# Altium PCB FPGA_board.PcbDoc (part 3 of 7)
Units mm, origin at the board's own origin, x right, y up, seen from the top; angles counter-clockwise.
Board outline 120 x 95 mm, 2 copper layers (Top Layer, Bottom Layer); 242 components, 219 nets, 1224 pads, 430 vias.
Unrouted connection lines stored in the file: 9.
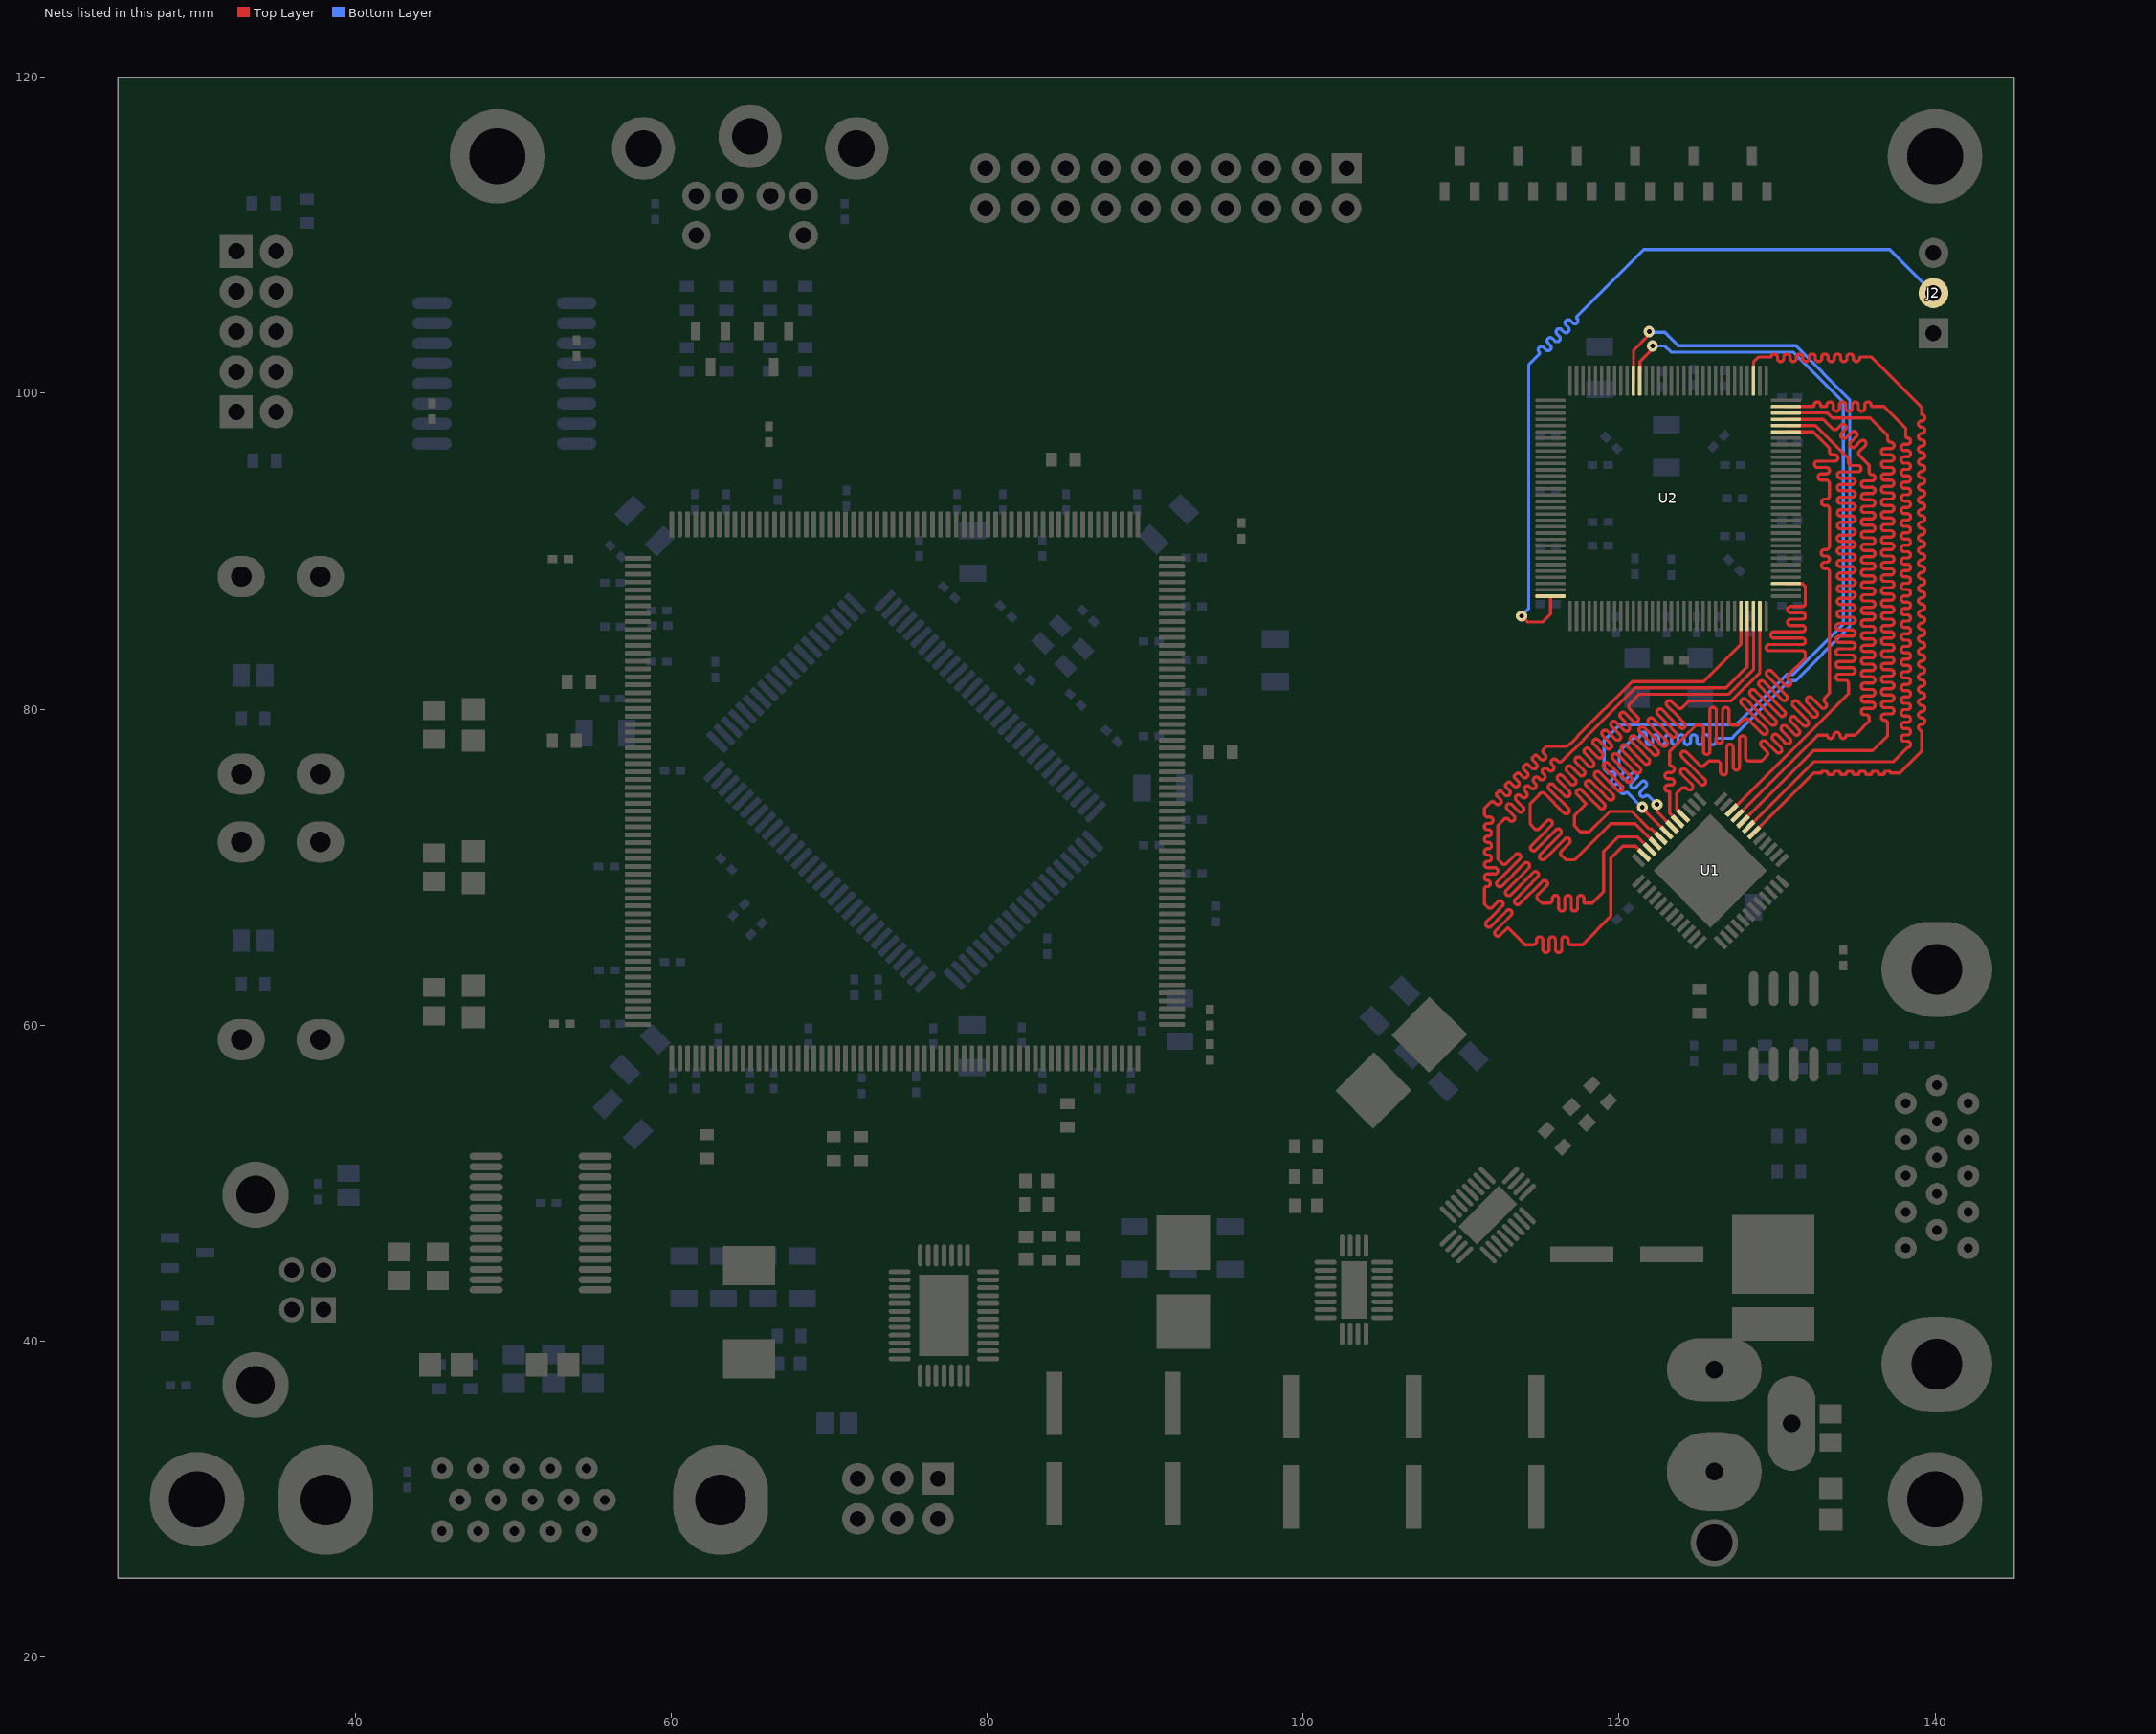
[diagram p3: the nets of this part, all layers, seen from the top]

## Via types
v1: diameter 0.71, hole 0.3, Top Layer to Bottom Layer, 393 vias
v2: diameter 1.4, hole 0.6, Top Layer to Bottom Layer, 32 vias
v3: diameter 2, hole 0.9, Top Layer to Bottom Layer, 4 vias
v4: diameter 1.2, hole 0.5, Top Layer to Bottom Layer, 1 vias

## Nets (pads, with @x,y where several pads share a name; then routed paths per layer and width w, separated by ;. In a path a pad name is that pad's centre, name@x,y a point inside that pad or via, vN(x,y) a via of type N, cw(c..) or ccw(c..) an arc to the next point about the centre after c; other vN are vias at no path point) (continued)
FB_D11: U1.6 U2.67 | length 64.8
  Top Layer w0.2: U2.67@128.51,100.803 128.51,101.973 128.837,102.3 129.225,102.3 129.625,102.3 cw(c129.8,102.3) 129.8,102.475 129.85,102.475 cw(c129.85,102.3) 130.025,102.3 130.025,102.2 ccw(c130.225,102.2) 130.225,102 ccw(c130.225,102.2) 130.425,102.2 130.425,102.3 cw(c130.6,102.3) 130.6,102.475 130.65,102.475 cw(c130.65,102.3) 130.825,102.3 130.825,102.2 ccw(c131.025,102.2) 131.025,102 ccw(c131.025,102.2) 131.225,102.2 131.225,102.3 cw(c131.4,102.3) 131.4,102.475 131.45,102.475 cw(c131.45,102.3) 131.625,102.3 131.625,102.2 ccw(c131.825,102.2) 131.825,102 ccw(c131.825,102.2) 132.025,102.2 132.025,102.3 cw(c132.2,102.3) 132.2,102.475 132.25,102.475 cw(c132.25,102.3) 132.425,102.3 132.425,102.2 ccw(c132.625,102.2) 132.625,102 ccw(c132.625,102.2) 132.825,102.2 132.825,102.3 cw(c133,102.3) 133,102.475 133.05,102.475 cw(c133.05,102.3) 133.225,102.3 133.225,102.2 ccw(c133.425,102.2) 133.425,102 ccw(c133.425,102.2) 133.625,102.2 133.625,102.3 cw(c133.8,102.3) 133.8,102.475 133.85,102.475 cw(c133.85,102.3) 134.025,102.3 134.025,102.2 ccw(c134.225,102.2) 134.225,102 ccw(c134.225,102.2) 134.425,102.2 134.425,102.3 cw(c134.6,102.3) 134.6,102.475 134.65,102.475 cw(c134.65,102.3) 134.825,102.3 134.825,102.2 ccw(c135.025,102.2) 135.025,102 ccw(c135.025,102.2) 135.225,102.2 cw(c135.325,102.2) 135.325,102.3 135.425,102.3 135.95,102.3 139.15,99.1 139.15,98.65 cw(c139.15,98.45) 139.15,98.25 ccw(c139.15,98.05) 139.15,97.85 cw(c139.15,97.65) 139.15,97.45 ccw(c139.15,97.25) 139.15,97.05 cw(c139.15,96.85) 139.15,96.65 ccw(c139.15,96.45) 139.15,96.25 cw(c139.15,96.05) 139.15,95.85 ccw(c139.15,95.65) 139.15,95.45 cw(c139.15,95.25) 139.15,95.05 ccw(c139.15,94.85) 139.15,94.65 cw(c139.15,94.45) 139.15,94.25 ccw(c139.15,94.05) 139.15,93.85 cw(c139.15,93.65) 139.15,93.45 ccw(c139.15,93.25) 139.15,93.05 cw(c139.15,92.85) 139.15,92.65 ccw(c139.15,92.45) 139.15,92.25 cw(c139.15,92.05) 139.15,91.85 ccw(c139.15,91.65) 139.15,91.45 cw(c139.15,91.25) 139.15,91.05 ccw(c139.15,90.85) 139.15,90.65 cw(c139.15,90.45) 139.15,90.25 ccw(c139.15,90.05) 139.15,89.85 cw(c139.15,89.65) 139.15,89.45 ccw(c139.15,89.25) 139.15,89.05 cw(c139.15,88.85) 139.15,88.65 ccw(c139.15,88.45) 139.15,88.25 cw(c139.15,88.05) 139.15,87.85 ccw(c139.15,87.65) 139.15,87.45 cw(c139.15,87.25) 139.15,87.05 ccw(c139.15,86.85) 139.15,86.65 cw(c139.15,86.45) 139.15,86.25 ccw(c139.15,86.05) 139.15,85.85 cw(c139.15,85.65) 139.15,85.45 ccw(c139.15,85.25) 139.15,85.05 cw(c139.15,84.85) 139.15,84.65 ccw(c139.15,84.45) 139.15,84.25 cw(c139.15,84.05) 139.15,83.85 ccw(c139.15,83.65) 139.15,83.45 cw(c139.15,83.25) 139.15,83.05 ccw(c139.15,82.85) 139.15,82.65 cw(c139.15,82.45) 139.15,82.25 ccw(c139.15,82.05) 139.15,81.85 cw(c139.15,81.65) 139.15,81.45 ccw(c139.15,81.25) 139.15,81.05 cw(c139.15,80.85) 139.15,80.65 ccw(c139.15,80.45) 139.15,80.25 cw(c139.15,80.05) 139.15,79.85 ccw(c139.15,79.65) 139.15,79.45 cw(c139.15,79.25) 139.15,79.05 ccw(c139.15,78.85) 139.15,78.65 139.15,78.35 139.15,77.35 137.773,75.973 137.45,75.973 137.2,75.973 ccw(c137.1,75.973) 137.1,76.073 136.9,76.073 ccw(c136.9,75.973) 136.8,75.973 cw(c136.7,75.973) 136.7,75.873 136.5,75.873 cw(c136.5,75.973) 136.4,75.973 ccw(c136.3,75.973) 136.3,76.073 136.1,76.073 ccw(c136.1,75.973) 136,75.973 cw(c135.9,75.973) 135.9,75.873 135.7,75.873 cw(c135.7,75.973) 135.6,75.973 ccw(c135.5,75.973) 135.5,76.073 135.3,76.073 ccw(c135.3,75.973) 135.2,75.973 cw(c135.1,75.973) 135.1,75.873 134.9,75.873 cw(c134.9,75.973) 134.8,75.973 ccw(c134.7,75.973) 134.7,76.073 134.5,76.073 ccw(c134.5,75.973) 134.4,75.973 cw(c134.3,75.973) 134.3,75.873 134.1,75.873 cw(c134.1,75.973) 134,75.973 ccw(c133.9,75.973) 133.9,76.073 133.7,76.073 ccw(c133.7,75.973) 133.6,75.973 cw(c133.5,75.973) 133.5,75.873 133.3,75.873 cw(c133.3,75.973) 133.2,75.973 ccw(c133.1,75.973) 133.1,76.073 132.9,76.073 ccw(c132.9,75.973) 132.8,75.973 132.6,75.973 132.327,75.973 U1.6@128.55,72.197
FB_D12: U1.7 U2.63 | length 64.6
  Top Layer w0.2: U1.7@128.197,72.55 132.323,76.677 137.352,76.677 138.25,77.575 ccw(c138.25,77.775) 138.45,77.775 ccw(c138.25,77.775) 138.25,77.975 138.15,77.975 138.05,77.975 cw(c138.05,78.175) 137.85,78.175 cw(c138.05,78.175) 138.05,78.375 138.15,78.375 138.25,78.375 ccw(c138.25,78.575) 138.45,78.575 ccw(c138.25,78.575) 138.25,78.775 138.15,78.775 138.05,78.775 cw(c138.05,78.975) 137.85,78.975 cw(c138.05,78.975) 138.05,79.175 138.15,79.175 138.25,79.175 ccw(c138.25,79.375) 138.45,79.375 ccw(c138.25,79.375) 138.25,79.575 138.15,79.575 138.05,79.575 cw(c138.05,79.775) 137.85,79.775 cw(c138.05,79.775) 138.05,79.975 138.15,79.975 138.25,79.975 ccw(c138.25,80.175) 138.45,80.175 ccw(c138.25,80.175) 138.25,80.375 138.15,80.375 138.05,80.375 cw(c138.05,80.575) 137.85,80.575 cw(c138.05,80.575) 138.05,80.775 138.15,80.775 138.25,80.775 ccw(c138.25,80.975) 138.45,80.975 ccw(c138.25,80.975) 138.25,81.175 138.15,81.175 138.05,81.175 cw(c138.05,81.375) 137.85,81.375 cw(c138.05,81.375) 138.05,81.575 138.15,81.575 138.25,81.575 ccw(c138.25,81.775) 138.45,81.775 ccw(c138.25,81.775) 138.25,81.975 138.15,81.975 138.05,81.975 cw(c138.05,82.175) 137.85,82.175 cw(c138.05,82.175) 138.05,82.375 138.15,82.375 138.25,82.375 ccw(c138.25,82.575) 138.45,82.575 ccw(c138.25,82.575) 138.25,82.775 138.15,82.775 138.05,82.775 cw(c138.05,82.975) 137.85,82.975 cw(c138.05,82.975) 138.05,83.175 138.15,83.175 138.25,83.175 ccw(c138.25,83.375) 138.45,83.375 ccw(c138.25,83.375) 138.25,83.575 138.15,83.575 138.05,83.575 cw(c138.05,83.775) 137.85,83.775 cw(c138.05,83.775) 138.05,83.975 138.15,83.975 138.25,83.975 ccw(c138.25,84.175) 138.45,84.175 ccw(c138.25,84.175) 138.25,84.375 138.15,84.375 138.05,84.375 cw(c138.05,84.575) 137.85,84.575 cw(c138.05,84.575) 138.05,84.775 138.15,84.775 138.25,84.775 ccw(c138.25,84.975) 138.45,84.975 ccw(c138.25,84.975) 138.25,85.175 138.15,85.175 138.05,85.175 cw(c138.05,85.375) 137.85,85.375 cw(c138.05,85.375) 138.05,85.575 138.15,85.575 138.25,85.575 ccw(c138.25,85.775) 138.45,85.775 ccw(c138.25,85.775) 138.25,85.975 138.15,85.975 138.05,85.975 cw(c138.05,86.175) 137.85,86.175 cw(c138.05,86.175) 138.05,86.375 138.15,86.375 138.25,86.375 ccw(c138.25,86.575) 138.45,86.575 ccw(c138.25,86.575) 138.25,86.775 138.15,86.775 138.05,86.775 cw(c138.05,86.975) 137.85,86.975 cw(c138.05,86.975) 138.05,87.175 138.15,87.175 138.25,87.175 ccw(c138.25,87.375) 138.45,87.375 ccw(c138.25,87.375) 138.25,87.575 138.15,87.575 138.05,87.575 cw(c138.05,87.775) 137.85,87.775 cw(c138.05,87.775) 138.05,87.975 138.15,87.975 138.25,87.975 ccw(c138.25,88.175) 138.45,88.175 ccw(c138.25,88.175) 138.25,88.375 138.15,88.375 138.05,88.375 cw(c138.05,88.575) 137.85,88.575 cw(c138.05,88.575) 138.05,88.775 138.15,88.775 138.25,88.775 ccw(c138.25,88.975) 138.45,88.975 ccw(c138.25,88.975) 138.25,89.175 138.15,89.175 138.05,89.175 cw(c138.05,89.375) 137.85,89.375 cw(c138.05,89.375) 138.05,89.575 138.15,89.575 138.25,89.575 ccw(c138.25,89.775) 138.45,89.775 ccw(c138.25,89.775) 138.25,89.975 138.15,89.975 138.05,89.975 cw(c138.05,90.175) 137.85,90.175 cw(c138.05,90.175) 138.05,90.375 138.15,90.375 138.25,90.375 ccw(c138.25,90.575) 138.45,90.575 ccw(c138.25,90.575) 138.25,90.775 138.15,90.775 138.05,90.775 cw(c138.05,90.975) 137.85,90.975 cw(c138.05,90.975) 138.05,91.175 138.15,91.175 138.25,91.175 ccw(c138.25,91.375) 138.45,91.375 ccw(c138.25,91.375) 138.25,91.575 138.15,91.575 138.05,91.575 cw(c138.05,91.775) 137.85,91.775 cw(c138.05,91.775) 138.05,91.975 138.15,91.975 138.25,91.975 ccw(c138.25,92.175) 138.45,92.175 ccw(c138.25,92.175) 138.25,92.375 138.15,92.375 138.05,92.375 cw(c138.05,92.575) 137.85,92.575 cw(c138.05,92.575) 138.05,92.775 138.15,92.775 138.25,92.775 ccw(c138.25,92.975) 138.45,92.975 ccw(c138.25,92.975) 138.25,93.175 138.15,93.175 138.05,93.175 cw(c138.05,93.375) 137.85,93.375 cw(c138.05,93.375) 138.05,93.575 138.15,93.575 138.25,93.575 ccw(c138.25,93.775) 138.45,93.775 ccw(c138.25,93.775) 138.25,93.975 138.15,93.975 138.05,93.975 cw(c138.05,94.175) 137.85,94.175 cw(c138.05,94.175) 138.05,94.375 138.15,94.375 138.25,94.375 ccw(c138.25,94.575) 138.45,94.575 ccw(c138.25,94.575) 138.25,94.775 138.15,94.775 138.05,94.775 cw(c138.05,94.975) 137.85,94.975 cw(c138.05,94.975) 138.05,95.175 138.15,95.175 138.25,95.175 ccw(c138.25,95.375) 138.45,95.375 ccw(c138.25,95.375) 138.25,95.575 138.15,95.575 138.05,95.575 cw(c138.05,95.775) 137.85,95.775 cw(c138.05,95.775) 138.05,95.975 138.15,95.975 138.25,95.975 ccw(c138.25,96.175) 138.45,96.175 ccw(c138.25,96.175) 138.25,96.375 138.15,96.375 138.05,96.375 cw(c138.05,96.575) 137.85,96.575 cw(c138.05,96.575) 138.05,96.775 138.15,96.775 138.25,96.775 ccw(c138.25,96.975) 138.45,96.975 ccw(c138.25,96.975) 138.25,97.175 cw(c138.25,97.275) 138.15,97.275 138.15,97.375 138.15,97.775 136.772,99.153 136.2,99.153 136.05,99.153 cw(c136.05,99.253) 135.95,99.253 ccw(c135.75,99.253) 135.75,99.453 ccw(c135.75,99.253) 135.55,99.253 135.55,99.153 135.55,99.053 cw(c135.35,99.053) 135.35,98.853 cw(c135.35,99.053) 135.15,99.053 135.15,99.153 135.15,99.253 ccw(c134.95,99.253) 134.95,99.453 ccw(c134.95,99.253) 134.75,99.253 134.75,99.153 134.75,99.053 cw(c134.55,99.053) 134.55,98.853 cw(c134.55,99.053) 134.35,99.053 134.35,99.153 134.35,99.253 ccw(c134.15,99.253) 134.15,99.453 ccw(c134.15,99.253) 133.95,99.253 133.95,99.153 133.95,99.053 cw(c133.75,99.053) 133.75,98.853 cw(c133.75,99.053) 133.55,99.053 133.55,99.153 133.55,99.253 ccw(c133.35,99.253) 133.35,99.453 ccw(c133.35,99.253) 133.15,99.253 cw(c133.05,99.253) 133.05,99.153 132.85,99.153 cw(c132.85,99.253) 132.75,99.253 ccw(c132.55,99.253) 132.55,99.453 ccw(c132.55,99.253) 132.35,99.253 cw(c132.25,99.253) 132.25,99.153 132.15,99.153 U2.63@130.56,99.153
FB_D13: U1.8 U2.62 | length 64.9
  Top Layer w0.2: U1.8@127.843,72.904 132.32,77.38 136.055,77.38 137,78.325 137,78.95 137,79.1 ccw(c136.8,79.1) 136.8,79.3 cw(c136.8,79.5) 136.6,79.5 cw(c136.8,79.5) 136.8,79.7 137,79.7 137.2,79.7 ccw(c137.2,79.9) 137.4,79.9 ccw(c137.2,79.9) 137.2,80.1 137,80.1 136.8,80.1 cw(c136.8,80.3) 136.6,80.3 cw(c136.8,80.3) 136.8,80.5 137,80.5 137.2,80.5 ccw(c137.2,80.7) 137.4,80.7 ccw(c137.2,80.7) 137.2,80.9 137,80.9 136.8,80.9 cw(c136.8,81.1) 136.6,81.1 cw(c136.8,81.1) 136.8,81.3 137,81.3 137.2,81.3 ccw(c137.2,81.5) 137.4,81.5 ccw(c137.2,81.5) 137.2,81.7 137,81.7 136.8,81.7 cw(c136.8,81.9) 136.6,81.9 cw(c136.8,81.9) 136.8,82.1 137,82.1 137.2,82.1 ccw(c137.2,82.3) 137.4,82.3 ccw(c137.2,82.3) 137.2,82.5 137,82.5 136.8,82.5 cw(c136.8,82.7) 136.6,82.7 cw(c136.8,82.7) 136.8,82.9 137,82.9 137.2,82.9 ccw(c137.2,83.1) 137.4,83.1 ccw(c137.2,83.1) 137.2,83.3 137,83.3 136.8,83.3 cw(c136.8,83.5) 136.6,83.5 cw(c136.8,83.5) 136.8,83.7 137,83.7 137.2,83.7 ccw(c137.2,83.9) 137.4,83.9 ccw(c137.2,83.9) 137.2,84.1 137,84.1 136.8,84.1 cw(c136.8,84.3) 136.6,84.3 cw(c136.8,84.3) 136.8,84.5 137,84.5 137.2,84.5 ccw(c137.2,84.7) 137.4,84.7 ccw(c137.2,84.7) 137.2,84.9 137,84.9 136.8,84.9 cw(c136.8,85.1) 136.6,85.1 cw(c136.8,85.1) 136.8,85.3 137,85.3 137.2,85.3 ccw(c137.2,85.5) 137.4,85.5 ccw(c137.2,85.5) 137.2,85.7 137,85.7 136.8,85.7 cw(c136.8,85.9) 136.6,85.9 cw(c136.8,85.9) 136.8,86.1 137,86.1 137.2,86.1 ccw(c137.2,86.3) 137.4,86.3 ccw(c137.2,86.3) 137.2,86.5 137,86.5 136.8,86.5 cw(c136.8,86.7) 136.6,86.7 cw(c136.8,86.7) 136.8,86.9 137,86.9 137.2,86.9 ccw(c137.2,87.1) 137.4,87.1 ccw(c137.2,87.1) 137.2,87.3 137,87.3 136.8,87.3 cw(c136.8,87.5) 136.6,87.5 cw(c136.8,87.5) 136.8,87.7 137,87.7 137.2,87.7 ccw(c137.2,87.9) 137.4,87.9 ccw(c137.2,87.9) 137.2,88.1 137,88.1 136.8,88.1 cw(c136.8,88.3) 136.6,88.3 cw(c136.8,88.3) 136.8,88.5 137,88.5 137.2,88.5 ccw(c137.2,88.7) 137.4,88.7 ccw(c137.2,88.7) 137.2,88.9 137,88.9 136.8,88.9 cw(c136.8,89.1) 136.6,89.1 cw(c136.8,89.1) 136.8,89.3 137,89.3 137.2,89.3 ccw(c137.2,89.5) 137.4,89.5 ccw(c137.2,89.5) 137.2,89.7 137,89.7 136.8,89.7 cw(c136.8,89.9) 136.6,89.9 cw(c136.8,89.9) 136.8,90.1 137,90.1 137.2,90.1 ccw(c137.2,90.3) 137.4,90.3 ccw(c137.2,90.3) 137.2,90.5 137,90.5 136.8,90.5 cw(c136.8,90.7) 136.6,90.7 cw(c136.8,90.7) 136.8,90.9 137,90.9 137.2,90.9 ccw(c137.2,91.1) 137.4,91.1 ccw(c137.2,91.1) 137.2,91.3 137,91.3 136.8,91.3 cw(c136.8,91.5) 136.6,91.5 cw(c136.8,91.5) 136.8,91.7 137,91.7 137.2,91.7 ccw(c137.2,91.9) 137.4,91.9 ccw(c137.2,91.9) 137.2,92.1 137,92.1 136.8,92.1 cw(c136.8,92.3) 136.6,92.3 cw(c136.8,92.3) 136.8,92.5 137,92.5 137.2,92.5 ccw(c137.2,92.7) 137.4,92.7 ccw(c137.2,92.7) 137.2,92.9 137,92.9 136.8,92.9 cw(c136.8,93.1) 136.6,93.1 cw(c136.8,93.1) 136.8,93.3 137,93.3 137.2,93.3 ccw(c137.2,93.5) 137.4,93.5 ccw(c137.2,93.5) 137.2,93.7 137,93.7 136.8,93.7 cw(c136.8,93.9) 136.6,93.9 cw(c136.8,93.9) 136.8,94.1 137,94.1 137.2,94.1 ccw(c137.2,94.3) 137.4,94.3 ccw(c137.2,94.3) 137.2,94.5 137,94.5 136.8,94.5 cw(c136.8,94.7) 136.6,94.7 cw(c136.8,94.7) 136.8,94.9 137,94.9 137.2,94.9 ccw(c137.2,95.1) 137.4,95.1 ccw(c137.2,95.1) 137.2,95.3 137,95.3 136.8,95.3 cw(c136.8,95.5) 136.6,95.5 cw(c136.8,95.5) 136.8,95.7 137,95.7 137.2,95.7 ccw(c137.2,95.9) 137.4,95.9 ccw(c137.2,95.9) 137.2,96.1 137,96.1 136.8,96.1 cw(c136.8,96.3) 136.6,96.3 cw(c136.8,96.3) 136.8,96.5 137,96.5 137.2,96.5 ccw(c137.2,96.7) 137.4,96.7 ccw(c137.2,96.7) 137.2,96.9 cw(c137.2,97.1) 137,97.1 137,97.325 135.883,98.442 133.497,98.442 133.195,98.744 133.106,98.744 ; U2.62@130.56,98.753 133.097,98.753 133.106,98.744 ; 133.097,98.744 133.106,98.744
FB_D14: U1.9 U2.61 | length 65
  Top Layer w0.2: U1.9@127.49,73.258 132.582,78.35 132.782,78.35 133.182,78.35 ccw(c133.382,78.35) 133.382,78.15 ccw(c133.382,78.35) 133.582,78.35 cw(c133.782,78.35) 133.782,78.55 cw(c133.782,78.35) 133.982,78.35 ccw(c134.182,78.35) 134.182,78.15 ccw(c134.182,78.35) 134.382,78.35 134.782,78.35 134.925,78.35 135.066,78.491 135.125,78.55 135.684,79.109 135.825,79.25 135.825,79.45 ccw(c135.625,79.45) 135.625,79.65 135.525,79.65 cw(c135.525,79.85) 135.325,79.85 cw(c135.525,79.85) 135.525,80.05 135.825,80.05 136.002,80.05 ccw(c136.002,80.25) 136.202,80.25 ccw(c136.002,80.25) 136.002,80.45 135.825,80.45 135.525,80.45 cw(c135.525,80.65) 135.325,80.65 cw(c135.525,80.65) 135.525,80.85 135.825,80.85 136.002,80.85 ccw(c136.002,81.05) 136.202,81.05 ccw(c136.002,81.05) 136.002,81.25 135.825,81.25 135.525,81.25 cw(c135.525,81.45) 135.325,81.45 cw(c135.525,81.45) 135.525,81.65 135.825,81.65 136.002,81.65 ccw(c136.002,81.85) 136.202,81.85 ccw(c136.002,81.85) 136.002,82.05 135.825,82.05 135.525,82.05 cw(c135.525,82.25) 135.325,82.25 cw(c135.525,82.25) 135.525,82.45 135.825,82.45 136.002,82.45 ccw(c136.002,82.65) 136.202,82.65 ccw(c136.002,82.65) 136.002,82.85 135.825,82.85 135.525,82.85 cw(c135.525,83.05) 135.325,83.05 cw(c135.525,83.05) 135.525,83.25 135.825,83.25 136.002,83.25 ccw(c136.002,83.45) 136.202,83.45 ccw(c136.002,83.45) 136.002,83.65 135.825,83.65 135.525,83.65 cw(c135.525,83.85) 135.325,83.85 cw(c135.525,83.85) 135.525,84.05 135.825,84.05 136.002,84.05 ccw(c136.002,84.25) 136.202,84.25 ccw(c136.002,84.25) 136.002,84.45 135.825,84.45 135.525,84.45 cw(c135.525,84.65) 135.325,84.65 cw(c135.525,84.65) 135.525,84.85 135.825,84.85 136.002,84.85 ccw(c136.002,85.05) 136.202,85.05 ccw(c136.002,85.05) 136.002,85.25 135.825,85.25 135.525,85.25 cw(c135.525,85.45) 135.325,85.45 cw(c135.525,85.45) 135.525,85.65 135.825,85.65 136.002,85.65 ccw(c136.002,85.85) 136.202,85.85 ccw(c136.002,85.85) 136.002,86.05 135.825,86.05 135.525,86.05 cw(c135.525,86.25) 135.325,86.25 cw(c135.525,86.25) 135.525,86.45 135.825,86.45 136.002,86.45 ccw(c136.002,86.65) 136.202,86.65 ccw(c136.002,86.65) 136.002,86.85 135.825,86.85 135.525,86.85 cw(c135.525,87.05) 135.325,87.05 cw(c135.525,87.05) 135.525,87.25 135.825,87.25 136.002,87.25 ccw(c136.002,87.45) 136.202,87.45 ccw(c136.002,87.45) 136.002,87.65 135.825,87.65 135.525,87.65 cw(c135.525,87.85) 135.325,87.85 cw(c135.525,87.85) 135.525,88.05 135.825,88.05 136.002,88.05 ccw(c136.002,88.25) 136.202,88.25 ccw(c136.002,88.25) 136.002,88.45 135.825,88.45 135.525,88.45 cw(c135.525,88.65) 135.325,88.65 cw(c135.525,88.65) 135.525,88.85 135.825,88.85 136.002,88.85 ccw(c136.002,89.05) 136.202,89.05 ccw(c136.002,89.05) 136.002,89.25 135.825,89.25 135.525,89.25 cw(c135.525,89.45) 135.325,89.45 cw(c135.525,89.45) 135.525,89.65 135.825,89.65 136.002,89.65 ccw(c136.002,89.85) 136.202,89.85 ccw(c136.002,89.85) 136.002,90.05 135.825,90.05 135.525,90.05 cw(c135.525,90.25) 135.325,90.25 cw(c135.525,90.25) 135.525,90.45 135.825,90.45 136.002,90.45 ccw(c136.002,90.65) 136.202,90.65 ccw(c136.002,90.65) 136.002,90.85 135.825,90.85 135.525,90.85 cw(c135.525,91.05) 135.325,91.05 cw(c135.525,91.05) 135.525,91.25 135.825,91.25 136.002,91.25 ccw(c136.002,91.45) 136.202,91.45 ccw(c136.002,91.45) 136.002,91.65 135.825,91.65 135.525,91.65 cw(c135.525,91.85) 135.325,91.85 cw(c135.525,91.85) 135.525,92.05 135.825,92.05 136.002,92.05 ccw(c136.002,92.25) 136.202,92.25 ccw(c136.002,92.25) 136.002,92.45 135.825,92.45 135.525,92.45 cw(c135.525,92.65) 135.325,92.65 cw(c135.525,92.65) 135.525,92.85 135.825,92.85 136.002,92.85 ccw(c136.002,93.05) 136.202,93.05 ccw(c136.002,93.05) 136.002,93.25 135.825,93.25 135.525,93.25 cw(c135.525,93.45) 135.325,93.45 cw(c135.525,93.45) 135.525,93.65 135.825,93.65 136.002,93.65 ccw(c136.002,93.85) 136.202,93.85 ccw(c136.002,93.85) 136.002,94.05 135.825,94.05 135.525,94.05 cw(c135.525,94.25) 135.325,94.25 cw(c135.525,94.25) 135.525,94.45 135.825,94.45 136.002,94.45 ccw(c136.002,94.65) 136.202,94.65 ccw(c136.002,94.65) 136.002,94.85 cw(c136.002,95.027) 135.825,95.027 135.825,95.45 135.625,95.65 135.222,96.053 ; U2.61@130.56,98.353 132.921,98.353 133.524,97.75 ccw(c133.666,97.891) 133.807,97.75 134.04,97.983 cw(c134.182,97.842) 134.323,97.983 cw(c134.182,97.842) 134.323,97.7 134.09,97.467 ccw(c134.232,97.326) 134.09,97.184 ccw(c134.232,97.326) 134.373,97.184 134.727,97.538 cw(c134.868,97.396) 135.009,97.538 cw(c134.868,97.396) 135.009,97.255 134.656,96.901 ccw(c134.797,96.76) 134.656,96.619 ccw(c134.797,96.76) 134.939,96.619 135.292,96.972 cw(c135.434,96.831) 135.575,96.972 cw(c135.434,96.831) 135.575,96.689 135.222,96.336 ccw(c135.363,96.194) 135.222,96.053 ; 135.363,95.912 135.222,96.053
FB_D15: U1.10 U2.60 | length 64.5
  Top Layer w0.2: U1.10@127.136,73.54 U1.10@127.172,73.576 ; U1.10@127.136,73.611 134.525,81 134.525,81.475 134.525,81.625 ccw(c134.325,81.625) 134.325,81.825 133.925,81.825 cw(c133.925,82.025) 133.725,82.025 cw(c133.925,82.025) 133.925,82.225 134.525,82.225 134.744,82.225 ccw(c134.744,82.425) 134.944,82.425 ccw(c134.744,82.425) 134.744,82.625 134.525,82.625 133.925,82.625 cw(c133.925,82.825) 133.725,82.825 cw(c133.925,82.825) 133.925,83.025 134.525,83.025 134.744,83.025 ccw(c134.744,83.225) 134.944,83.225 ccw(c134.744,83.225) 134.744,83.425 134.525,83.425 133.925,83.425 cw(c133.925,83.625) 133.725,83.625 cw(c133.925,83.625) 133.925,83.825 134.525,83.825 134.744,83.825 ccw(c134.744,84.025) 134.944,84.025 ccw(c134.744,84.025) 134.744,84.225 134.525,84.225 133.925,84.225 cw(c133.925,84.425) 133.725,84.425 cw(c133.925,84.425) 133.925,84.625 134.525,84.625 134.744,84.625 ccw(c134.744,84.825) 134.944,84.825 ccw(c134.744,84.825) 134.744,85.025 134.525,85.025 133.925,85.025 cw(c133.925,85.225) 133.725,85.225 cw(c133.925,85.225) 133.925,85.425 134.525,85.425 134.744,85.425 ccw(c134.744,85.625) 134.944,85.625 ccw(c134.744,85.625) 134.744,85.825 134.525,85.825 133.987,85.825 cw(c133.987,86.025) 133.787,86.025 cw(c133.987,86.025) 133.987,86.225 134.525,86.225 134.744,86.225 ccw(c134.744,86.425) 134.944,86.425 ccw(c134.744,86.425) 134.744,86.625 134.525,86.625 134,86.625 cw(c134,86.825) 133.8,86.825 cw(c134,86.825) 134,87.025 134.525,87.025 134.744,87.025 ccw(c134.744,87.225) 134.944,87.225 ccw(c134.744,87.225) 134.744,87.425 134.525,87.425 134,87.425 cw(c134,87.625) 133.8,87.625 cw(c134,87.625) 134,87.825 134.525,87.825 134.744,87.825 ccw(c134.744,88.025) 134.944,88.025 ccw(c134.744,88.025) 134.744,88.225 134.525,88.225 134,88.225 cw(c134,88.425) 133.8,88.425 cw(c134,88.425) 134,88.625 134.525,88.625 134.744,88.625 ccw(c134.744,88.825) 134.944,88.825 ccw(c134.744,88.825) 134.744,89.025 134.525,89.025 134,89.025 cw(c134,89.225) 133.8,89.225 cw(c134,89.225) 134,89.425 134.525,89.425 134.744,89.425 ccw(c134.744,89.625) 134.944,89.625 ccw(c134.744,89.625) 134.744,89.825 134.525,89.825 134,89.825 cw(c134,90.025) 133.8,90.025 cw(c134,90.025) 134,90.225 134.525,90.225 134.744,90.225 ccw(c134.744,90.425) 134.944,90.425 ccw(c134.744,90.425) 134.744,90.625 134.525,90.625 134,90.625 cw(c134,90.825) 133.8,90.825 cw(c134,90.825) 134,91.025 134.525,91.025 134.744,91.025 ccw(c134.744,91.225) 134.944,91.225 ccw(c134.744,91.225) 134.744,91.425 134.525,91.425 134.011,91.425 cw(c134.011,91.625) 133.811,91.625 cw(c134.011,91.625) 134.011,91.825 134.525,91.825 134.744,91.825 ccw(c134.744,92.025) 134.944,92.025 ccw(c134.744,92.025) 134.744,92.225 134.525,92.225 134.011,92.225 cw(c134.011,92.425) 133.811,92.425 cw(c134.011,92.425) 134.011,92.625 134.525,92.625 134.744,92.625 ccw(c134.744,92.825) 134.944,92.825 ccw(c134.744,92.825) 134.744,93.025 134.525,93.025 134.011,93.025 cw(c134.011,93.225) 133.811,93.225 cw(c134.011,93.225) 134.011,93.425 134.525,93.425 134.744,93.425 ccw(c134.744,93.625) 134.944,93.625 ccw(c134.744,93.625) 134.744,93.825 134.525,93.825 134.011,93.825 cw(c134.011,94.025) 133.811,94.025 cw(c134.011,94.025) 134.011,94.225 134.525,94.225 134.744,94.225 ccw(c134.744,94.425) 134.944,94.425 ccw(c134.744,94.425) 134.744,94.625 134.525,94.625 134.011,94.625 cw(c134.011,94.825) 133.811,94.825 cw(c134.011,94.825) 134.011,95.025 134.525,95.025 135.125,95.025 ccw(c135.125,95.225) 135.325,95.225 ccw(c135.125,95.225) 135.125,95.425 134.725,95.425 cw(c134.725,95.625) 134.525,95.625 134.525,95.875 132.447,97.953 U2.60@130.56,97.953
FB_D16: U1.16 U2.59 | length 67.4
  Top Layer w0.2: U1.16@124.06,73.258 123.65,73.668 123.65,74.7 123.894,74.944 cw(c124.114,74.725) 124.333,74.944 ccw(c124.474,75.086) 124.616,74.944 ccw(c124.474,75.086) 124.616,75.227 124.396,75.446 123.943,75.9 cw(c124.084,76.041) 123.943,76.183 cw(c124.084,76.041) 124.226,76.183 124.679,75.729 125.146,75.262 ccw(c125.287,75.404) 125.429,75.262 ccw(c125.287,75.404) 125.429,75.545 124.962,76.012 123.972,77.002 cw(c124.114,77.143) 123.972,77.285 cw(c124.114,77.143) 124.255,77.285 125.103,76.436 ccw(c125.245,76.578) 125.386,76.436 125.528,76.578 125.669,76.719 126.019,76.719 126.219,76.719 cw(c126.219,76.519) 126.419,76.519 126.419,76.045 ccw(c126.619,76.045) 126.619,75.845 ccw(c126.619,76.045) 126.819,76.045 126.819,76.719 126.819,77.59 cw(c127.019,77.59) 127.019,77.79 cw(c127.019,77.59) 127.219,77.59 127.219,76.719 127.219,76.347 ccw(c127.419,76.347) 127.419,76.147 ccw(c127.419,76.347) 127.619,76.347 127.619,76.719 127.619,78.119 cw(c127.819,78.119) 127.819,78.319 cw(c127.819,78.119) 128.019,78.119 128.019,76.919 ccw(c128.219,76.919) 128.219,76.719 128.419,76.719 129.019,76.719 ; 128.819,76.719 129.019,76.719 ; U2.59@130.56,97.553 132.281,97.553 133.313,96.521 133.313,96.3 ccw(c133.513,96.3) 133.513,96.1 133.652,96.1 cw(c133.652,95.9) 133.852,95.9 cw(c133.652,95.9) 133.652,95.7 133.313,95.7 132.566,95.7 ccw(c132.566,95.5) 132.366,95.5 ccw(c132.566,95.5) 132.566,95.3 133.113,95.3 cw(c133.113,95.1) 133.313,95.1 cw(c133.113,95.1) 133.113,94.9 132.798,94.9 ccw(c132.798,94.7) 132.598,94.7 ccw(c132.798,94.7) 132.798,94.5 133.113,94.5 cw(c133.113,94.3) 133.313,94.3 133.313,94.1 133.313,93.7 133.313,93.5 cw(c133.113,93.5) 133.113,93.3 133.014,93.3 ccw(c133.014,93.1) 132.814,93.1 ccw(c133.014,93.1) 133.014,92.9 133.113,92.9 cw(c133.113,92.7) 133.313,92.7 133.313,92.5 133.313,92.1 133.313,91.3 ; 133.313,81.3 133.313,81.013 ; 133.313,87.3 133.313,88.1 ; 133.313,87.7 133.313,88.1 ; 133.313,91.7 133.313,91.3 ; 129.019,76.719 129.212,76.912 129.353,77.053 ccw(c129.212,77.195) 129.353,77.336 129.017,77.673 cw(c129.158,77.814) 129.017,77.956 cw(c129.158,77.814) 129.3,77.956 129.778,77.478 129.966,77.289 ccw(c130.107,77.431) 130.249,77.289 ccw(c130.107,77.431) 130.249,77.572 130.061,77.761 129.748,78.074 cw(c129.889,78.215) 129.748,78.356 cw(c129.889,78.215) 130.03,78.356 130.343,78.043 130.532,77.855 ccw(c130.673,77.997) 130.815,77.855 ccw(c130.673,77.997) 130.815,78.138 130.626,78.326 130.313,78.639 cw(c130.455,78.781) 130.313,78.922 cw(c130.455,78.781) 130.596,78.922 130.909,78.609 131.097,78.421 ccw(c131.239,78.562) 131.38,78.421 ccw(c131.239,78.562) 131.38,78.704 131.192,78.892 130.879,79.205 cw(c131.02,79.346) 130.879,79.488 cw(c131.02,79.346) 131.162,79.488 131.475,79.175 131.663,78.986 ccw(c131.805,79.128) 131.946,78.986 ccw(c131.805,79.128) 131.946,79.269 131.758,79.458 131.022,80.194 cw(c131.163,80.335) 131.022,80.477 cw(c131.163,80.335) 131.304,80.477 132.04,79.74 132.229,79.552 ccw(c132.37,79.694) 132.512,79.552 ccw(c132.37,79.694) 132.512,79.835 132.323,80.023 131.901,80.445 cw(c132.043,80.587) 131.901,80.728 cw(c132.043,80.587) 132.184,80.728 132.606,80.306 132.794,80.118 ccw(c132.936,80.259) 133.077,80.118 ccw(c132.936,80.259) 133.077,80.401 133.03,80.448 cw(c133.172,80.589) 133.03,80.73 133.172,80.872 133.313,81.013 ; 133.313,81.013 133.313,81.7 133.313,82.1 133.313,82.5 133.313,82.9 133.313,83.3 133.313,83.7 133.313,84.1 133.313,84.5 133.313,84.9 133.313,85.3 133.313,85.7 133.313,86.1 133.313,86.5 133.313,86.9 133.313,88.1 ; 133.313,88.1 133.313,88.5 133.313,88.7 ccw(c133.113,88.7) 133.113,88.9 133.018,88.9 cw(c133.018,89.1) 132.818,89.1 cw(c133.018,89.1) 133.018,89.3 133.113,89.3 ccw(c133.113,89.5) 133.313,89.5 ccw(c133.113,89.5) 133.113,89.7 132.992,89.7 cw(c132.992,89.9) 132.792,89.9 cw(c132.992,89.9) 132.992,90.1 133.113,90.1 ccw(c133.113,90.3) 133.313,90.3 133.313,90.5 133.313,90.9 133.313,91.3
FB_D17: U1.17 U2.35 | length 66.6
  Top Layer w0.2: U1.17@123.707,72.904 123.2,73.411 123.2,74.8 123.1,74.8 cw(c123.1,75) 122.9,75 cw(c123.1,75) 123.1,75.2 123.2,75.2 123.3,75.2 ccw(c123.3,75.4) 123.5,75.4 ccw(c123.3,75.4) 123.3,75.6 123.2,75.6 123.1,75.6 cw(c123.1,75.8) 122.9,75.8 cw(c123.1,75.8) 123.1,76 123.2,76 123.3,76 ccw(c123.3,76.2) 123.5,76.2 ccw(c123.3,76.2) 123.3,76.4 cw(c123.3,76.5) 123.2,76.5 123.2,76.6 123.2,77.325 ; 124.462,78.587 123.2,77.325 ; U2.35@130.56,87.953 131.584,87.953 131.584,87.943 131.594,87.943 131.79,87.747 131.79,87.36 131.784,87.353 131.79,87.347 131.79,86.8 131.79,86.7 cw(c131.59,86.7) 131.59,86.5 130.868,86.5 ccw(c130.868,86.3) 130.668,86.3 ccw(c130.868,86.3) 130.868,86.1 131.59,86.1 cw(c131.59,85.9) 131.79,85.9 cw(c131.59,85.9) 131.59,85.7 130.865,85.7 ccw(c130.865,85.5) 130.665,85.5 ccw(c130.865,85.5) 130.865,85.3 131.59,85.3 cw(c131.59,85.1) 131.79,85.1 cw(c131.59,85.1) 131.59,84.9 129.802,84.9 ccw(c129.802,84.7) 129.602,84.7 ccw(c129.802,84.7) 129.802,84.5 131.59,84.5 cw(c131.59,84.3) 131.79,84.3 cw(c131.59,84.3) 131.59,84.1 129.51,84.1 ccw(c129.51,83.9) 129.31,83.9 ccw(c129.51,83.9) 129.51,83.7 131.59,83.7 cw(c131.59,83.5) 131.79,83.5 131.79,83.24 130.725,82.175 ccw(c130.866,82.034) 130.725,81.892 130.816,81.801 cw(c130.675,81.659) 130.816,81.518 cw(c130.675,81.659) 130.534,81.518 130.301,81.751 129.647,82.404 ccw(c129.506,82.263) 129.364,82.404 ccw(c129.506,82.263) 129.364,82.122 130.018,81.468 130.601,80.885 cw(c130.459,80.744) 130.601,80.602 cw(c130.459,80.744) 130.318,80.602 129.735,81.185 129.172,81.748 ccw(c129.03,81.607) 128.889,81.748 ccw(c129.03,81.607) 128.889,81.465 129.452,80.902 130.468,79.886 cw(c130.327,79.745) 130.468,79.603 cw(c130.327,79.745) 130.185,79.603 129.169,80.619 128.606,81.183 ccw(c128.465,81.041) 128.323,81.183 ccw(c128.465,81.041) 128.323,80.9 128.887,80.337 129.902,79.321 cw(c129.761,79.179) 129.902,79.038 cw(c129.761,79.179) 129.62,79.038 128.604,80.054 128.04,80.617 ccw(c127.899,80.476) 127.758,80.617 ccw(c127.899,80.476) 127.758,80.334 128.321,79.771 129.337,78.755 cw(c129.195,78.613) 129.337,78.472 cw(c129.195,78.613) 129.054,78.472 128.179,79.347 ccw(c128.038,79.205) 127.897,79.347 127.755,79.205 127.55,79 127.35,79 127.15,79 cw(c127.15,79.2) 126.95,79.2 126.95,79.925 ccw(c126.75,79.925) 126.75,80.125 ccw(c126.75,79.925) 126.55,79.925 126.55,79 126.55,78.028 cw(c126.35,78.028) 126.35,77.828 cw(c126.35,78.028) 126.15,78.028 126.15,79 126.15,79.925 ccw(c125.95,79.925) 125.95,80.125 ccw(c125.95,79.925) 125.75,79.925 125.75,79 125.75,77.331 cw(c125.55,77.331) 125.55,77.131 cw(c125.55,77.331) 125.35,77.331 125.35,78.8 ccw(c125.15,78.8) 125.15,79 124.95,79 124.875,79 124.734,78.859 123.2,77.325
FB_D18: U1.18 U2.86 | length 67
  Top Layer w0.2: U2.86@120.91,100.803 120.91,101.623 120.92,101.633 120.92,102.72 121.9,103.7 v1(121.9,103.9) ; v1(122.4,73.975) 122.4,73.504 U1.18@123.353,72.55
  Bottom Layer w0.2: v1(121.9,103.9) 121.9,103.7 121.75,103.85 122.9,103.85 123.75,103 131.191,103 134.6,99.591 134.6,85.224 131.187,81.81 130.773,81.81 128.955,79.992 127.258,78.295 ; v1(122.4,73.975) 121.862,74.513 ccw(c121.759,74.409) 121.655,74.513 cw(c121.513,74.654) 121.372,74.513 cw(c121.513,74.654) 121.372,74.796 121.476,74.899 121.688,75.111 ccw(c121.546,75.253) 121.688,75.394 ccw(c121.546,75.253) 121.405,75.394 121.067,75.056 cw(c120.926,75.198) 120.784,75.056 cw(c120.926,75.198) 120.784,75.339 121.122,75.677 ccw(c120.981,75.818) 121.122,75.96 ccw(c120.981,75.818) 120.839,75.96 120.627,75.748 120.501,75.622 cw(c120.36,75.763) 120.219,75.622 cw(c120.36,75.763) 120.219,75.905 120.25,75.936 ccw(c120.156,76.031) 120.25,76.125 120,76.375 120,77.3 120.86,78.16 121.125,78.16 ccw(c121.125,78.36) 121.325,78.36 cw(c121.525,78.36) 121.525,78.56 cw(c121.525,78.36) 121.725,78.36 121.725,77.96 ccw(c121.925,77.96) 121.925,77.76 ccw(c121.925,77.96) 122.125,77.96 122.125,78.181 cw(c122.325,78.181) 122.325,78.381 cw(c122.325,78.181) 122.525,78.181 122.525,77.96 ccw(c122.725,77.96) 122.725,77.76 ccw(c122.725,77.96) 122.925,77.96 122.925,78.181 cw(c123.125,78.181) 123.125,78.381 cw(c123.125,78.181) 123.325,78.181 123.325,77.96 ccw(c123.525,77.96) 123.525,77.76 ccw(c123.525,77.96) 123.725,77.96 123.725,78.181 cw(c123.925,78.181) 123.925,78.381 cw(c123.925,78.181) 124.125,78.181 124.125,77.96 ccw(c124.325,77.96) 124.325,77.76 ccw(c124.325,77.96) 124.525,77.96 124.525,78.181 cw(c124.725,78.181) 124.725,78.381 cw(c124.725,78.181) 124.925,78.181 124.925,77.96 ccw(c125.125,77.96) 125.125,77.76 ccw(c125.125,77.96) 125.325,77.96 125.325,78.181 cw(c125.525,78.181) 125.525,78.381 cw(c125.525,78.181) 125.725,78.181 125.725,77.96 ccw(c125.925,77.96) 125.925,77.76 ccw(c125.925,77.96) 126.125,77.96 126.125,78.135 cw(c126.15,78.135) 126.15,78.16 127.14,78.16 127.258,78.278 127.258,78.295 ; 128.089,79.126 127.258,78.295
FB_D19: U1.19 U2.85 | length 56.5
  Top Layer w0.2: U2.85@121.31,100.803 121.31,101.458 121.32,101.468 121.32,102.01 121.959,102.649 ; v1(121.475,73.8) 121.475,73.721 U1.19@123,72.197
  Bottom Layer w0.2: v1(121.475,73.8) 121.458,73.8 120.544,74.715 ccw(c120.473,74.644) 120.402,74.715 cw(c120.261,74.856) 120.119,74.715 cw(c120.261,74.856) 120.119,74.998 ccw(c120.049,75.068) 120.119,75.139 119.978,75.281 ccw(c119.907,75.21) 119.836,75.281 cw(c119.695,75.422) 119.554,75.281 cw(c119.695,75.422) 119.554,75.563 119.695,75.705 ccw(c119.554,75.846) 119.695,75.988 ccw(c119.554,75.846) 119.412,75.988 cw(c119.341,76.058) 119.271,75.988 119.05,76.208 119.05,78.025 120.05,79.025 125.8,79.025 127.422,79.025 127.923,79.526 128.555,80.158 130.607,82.21 131.021,82.21 134.2,85.389 134.2,99.425 131.025,102.6 123.3,102.6 122.91,102.99 v1(122.116,102.99)
FB_D20: U1.20 U2.31 | length 64.7
  Top Layer w0.2: U1.20@122.646,71.843 122.052,72.437 121.912,72.437 120.82,73.529 119.404,73.529 118.125,72.25 117.55,72.25 117.175,72.625 117.175,73.275 117.875,73.975 ccw(c117.826,74.024) 117.875,74.072 117.358,74.589 cw(c117.499,74.731) 117.358,74.872 cw(c117.499,74.731) 117.641,74.872 118.206,74.306 118.77,73.743 ccw(c118.911,73.885) 119.052,73.743 ccw(c118.911,73.885) 119.052,74.026 118.489,74.589 117.924,75.155 cw(c118.065,75.296) 117.924,75.438 cw(c118.065,75.296) 118.206,75.438 118.772,74.872 119.338,74.306 ccw(c119.479,74.448) 119.621,74.306 ccw(c119.479,74.448) 119.621,74.589 119.055,75.155 118.489,75.721 cw(c118.631,75.862) 118.489,76.003 cw(c118.631,75.862) 118.772,76.003 119.338,75.438 119.903,74.872 ccw(c120.045,75.013) 120.186,74.872 ccw(c120.045,75.013) 120.186,75.155 119.621,75.721 119.055,76.286 cw(c119.196,76.428) 119.055,76.569 cw(c119.196,76.428) 119.338,76.569 119.903,76.003 120.469,75.438 ccw(c120.611,75.579) 120.752,75.438 ccw(c120.611,75.579) 120.752,75.721 120.186,76.286 119.621,76.852 cw(c119.762,76.993) 119.621,77.135 cw(c119.762,76.993) 119.903,77.135 120.469,76.569 121.035,76.003 ccw(c121.176,76.145) 121.318,76.003 ccw(c121.176,76.145) 121.318,76.286 120.752,76.852 120.186,77.418 cw(c120.328,77.559) 120.186,77.7 cw(c120.328,77.559) 120.469,77.7 121.035,77.135 121.601,76.569 ccw(c121.742,76.711) 121.883,76.569 ccw(c121.742,76.711) 121.883,76.852 121.318,77.418 120.752,77.983 cw(c120.893,78.125) 120.752,78.266 cw(c120.893,78.125) 121.035,78.266 121.601,77.7 122.166,77.135 ccw(c122.308,77.276) 122.449,77.135 ccw(c122.308,77.276) 122.449,77.418 121.883,77.983 121.318,78.549 cw(c121.459,78.69) 121.318,78.832 cw(c121.459,78.69) 121.6,78.832 122.166,78.266 122.729,77.703 ccw(c122.871,77.844) 123.012,77.703 ccw(c122.871,77.844) 123.012,77.986 122.449,78.549 121.883,79.115 cw(c122.025,79.256) 121.883,79.398 cw(c122.025,79.256) 122.166,79.398 122.732,78.832 123.295,78.269 ccw(c123.437,78.41) 123.578,78.269 ccw(c123.437,78.41) 123.578,78.551 123.015,79.115 122.449,79.68 cw(c122.59,79.822) 122.449,79.963 cw(c122.59,79.822) 122.732,79.963 123.298,79.398 123.861,78.834 ccw(c124.002,78.976) 124.144,78.834 ccw(c124.002,78.976) 124.144,79.117 123.58,79.68 123.052,80.209 cw(c123.194,80.35) 123.052,80.491 cw(c123.194,80.35) 123.335,80.491 123.722,80.105 ccw(c123.863,80.246) 124.005,80.105 124.146,80.246 124.287,80.387 124.425,80.525 127.1,80.525 128.91,82.335 U2.31@128.91,85.903
FB_D21: U1.21 U2.30 | length 64.9
  Top Layer w0.2: 114.725,74.375 114.375,74.025 ; U1.21@122.293,71.49 121.032,72.75 119.475,72.75 117.2,70.475 116.625,70.475 116.501,70.599 116.36,70.74 cw(c116.501,70.882) 116.36,71.023 116.855,71.518 ccw(c116.713,71.66) 116.855,71.801 ccw(c116.713,71.66) 116.572,71.801 115.935,71.165 115.299,70.528 cw(c115.157,70.67) 115.016,70.528 cw(c115.157,70.67) 115.016,70.811 115.652,71.448 116.289,72.084 ccw(c116.147,72.225) 116.289,72.367 ccw(c116.147,72.225) 116.006,72.367 115.37,71.73 114.733,71.094 cw(c114.592,71.235) 114.45,71.094 cw(c114.592,71.235) 114.45,71.377 115.087,72.013 115.723,72.65 ccw(c115.582,72.791) 115.723,72.932 ccw(c115.582,72.791) 115.44,72.932 114.945,72.437 cw(c114.804,72.579) 114.662,72.437 114.375,72.725 114.375,74.025 ; U2.30@128.51,85.903 128.51,82.519 126.941,80.95 121.975,80.95 121.9,80.95 121.5,80.95 121.3,80.95 121.089,80.739 120.806,80.456 120.665,80.315 ccw(c120.806,80.173) 120.665,80.032 121.183,79.514 cw(c121.041,79.373) 121.183,79.231 cw(c121.041,79.373) 120.9,79.231 120.382,79.749 ccw(c120.24,79.608) 120.099,79.749 ccw(c120.24,79.608) 120.099,79.466 120.617,78.948 cw(c120.475,78.807) 120.617,78.665 cw(c120.475,78.807) 120.334,78.665 119.816,79.183 ccw(c119.675,79.042) 119.533,79.183 ccw(c119.675,79.042) 119.533,78.9 120.051,78.383 cw(c119.91,78.241) 120.051,78.1 cw(c119.91,78.241) 119.768,78.1 119.25,78.618 ccw(c119.109,78.476) 118.968,78.618 ccw(c119.109,78.476) 118.968,78.335 119.486,77.817 cw(c119.344,77.675) 119.486,77.534 cw(c119.344,77.675) 119.203,77.534 118.685,78.052 ccw(c118.543,77.911) 118.402,78.052 ccw(c118.543,77.911) 118.402,77.769 118.92,77.251 cw(c118.778,77.11) 118.92,76.968 cw(c118.778,77.11) 118.637,76.968 118.119,77.486 ccw(c117.978,77.345) 117.836,77.486 ccw(c117.978,77.345) 117.836,77.203 118.354,76.686 cw(c118.213,76.544) 118.354,76.403 cw(c118.213,76.544) 118.071,76.403 117.553,76.921 ccw(c117.412,76.779) 117.271,76.921 ccw(c117.412,76.779) 117.271,76.638 117.788,76.12 cw(c117.647,75.978) 117.788,75.837 cw(c117.647,75.978) 117.506,75.837 116.988,76.355 ccw(c116.846,76.213) 116.705,76.355 ccw(c116.846,76.213) 116.705,76.072 117.223,75.554 cw(c117.081,75.413) 117.223,75.271 cw(c117.081,75.413) 116.94,75.271 116.422,75.789 ccw(c116.281,75.648) 116.139,75.789 ccw(c116.281,75.648) 116.139,75.506 116.844,74.802 cw(c116.702,74.66) 116.844,74.519 cw(c116.702,74.66) 116.561,74.519 115.856,75.224 ccw(c115.715,75.082) 115.574,75.224 ccw(c115.715,75.082) 115.574,74.941 116.797,73.717 cw(c116.656,73.576) 116.797,73.434 cw(c116.656,73.576) 116.514,73.434 115.291,74.658 ccw(c115.149,74.516) 115.008,74.658 114.866,74.516 114.375,74.025
FB_D22: U1.22 U2.29 | length 64.9
  Top Layer w0.2: U1.22@121.939,71.136 121.15,71.925 119.95,71.925 119.025,71 119.025,68.45 118.3,67.725 117.825,67.725 cw(c117.825,67.775) 117.775,67.775 117.775,68.025 ccw(c117.575,68.025) 117.575,68.225 ccw(c117.575,68.025) 117.375,68.025 117.375,67.425 cw(c117.175,67.425) 117.175,67.225 cw(c117.175,67.425) 116.975,67.425 116.975,68.025 ccw(c116.775,68.025) 116.775,68.225 ccw(c116.775,68.025) 116.575,68.025 116.575,67.425 cw(c116.375,67.425) 116.375,67.225 cw(c116.375,67.425) 116.175,67.425 116.175,68.025 ccw(c115.975,68.025) 115.975,68.225 ccw(c115.975,68.025) 115.775,68.025 115.775,67.925 cw(c115.575,67.925) 115.575,67.725 115.1,67.725 114.85,67.975 cw(c114.992,68.116) 114.85,68.258 115.416,68.823 ccw(c115.274,68.965) 115.416,69.106 ccw(c115.274,68.965) 115.133,69.106 113.719,67.692 cw(c113.577,67.833) 113.436,67.692 cw(c113.577,67.833) 113.436,67.975 114.143,68.682 114.85,69.389 ccw(c114.709,69.53) 114.85,69.672 ccw(c114.709,69.53) 114.567,69.672 113.153,68.258 cw(c113.012,68.399) 112.87,68.258 cw(c113.012,68.399) 112.87,68.54 114.285,69.955 ccw(c114.143,70.096) 114.285,70.237 ccw(c114.143,70.096) 114.002,70.237 112.587,68.823 cw(c112.446,68.965) 112.305,68.823 cw(c112.446,68.965) 112.305,69.106 113.719,70.52 ccw(c113.577,70.662) 113.719,70.803 ccw(c113.577,70.662) 113.436,70.803 112.87,70.238 cw(c112.729,70.379) 112.588,70.237 112.325,70.5 112.325,72.65 112.715,73.04 cw(c112.857,72.899) 112.998,73.04 113.069,72.97 ccw(c113.21,73.111) 113.352,72.969 ccw(c113.21,73.111) 113.352,73.252 113.139,73.464 112.927,73.677 cw(c113.069,73.818) 112.927,73.959 cw(c113.069,73.818) 113.21,73.959 113.422,73.747 113.634,73.536 ccw(c113.775,73.677) 113.916,73.536 ccw(c113.775,73.677) 113.916,73.819 113.705,74.03 113.493,74.242 cw(c113.634,74.384) 113.493,74.525 cw(c113.634,74.384) 113.776,74.525 113.847,74.454 ccw(c113.988,74.596) 114.129,74.454 ccw(c113.988,74.596) 114.129,74.737 114.059,74.808 cw(c114.2,74.949) 114.059,75.091 cw(c114.2,74.949) 114.342,75.091 114.412,75.02 ccw(c114.554,75.162) 114.695,75.02 ccw(c114.554,75.162) 114.695,75.303 114.624,75.374 cw(c114.766,75.515) 114.624,75.656 cw(c114.766,75.515) 114.907,75.656 114.978,75.586 ccw(c115.119,75.727) 115.261,75.586 ccw(c115.119,75.727) 115.261,75.869 115.19,75.939 cw(c115.332,76.081) 115.19,76.222 cw(c115.332,76.081) 115.473,76.222 115.544,76.151 ccw(c115.685,76.293) 115.826,76.151 ccw(c115.685,76.293) 115.826,76.434 115.756,76.505 cw(c115.897,76.646) 115.756,76.788 cw(c115.897,76.646) 116.039,76.788 116.109,76.717 ccw(c116.251,76.859) 116.392,76.717 117.124,77.449 117.143,77.449 117.761,78.067 117.761,78.086 121.025,81.35 126.776,81.35 128.11,82.684 U2.29@128.11,85.903
FB_D23: U1.23 U2.28 | length 64.7
  Top Layer w0.2: 113.617,75.431 cw(c113.476,75.289) 113.617,75.148 cw(c113.476,75.289) 113.335,75.148 113.116,75.366 ccw(c113.032,75.282) 112.948,75.366 112.833,75.251 ccw(c112.917,75.167) 112.833,75.083 113.052,74.865 cw(c112.91,74.724) 113.052,74.582 cw(c112.91,74.724) 112.769,74.582 112.55,74.801 ccw(c112.467,74.717) 112.383,74.801 112.268,74.685 ccw(c112.352,74.602) 112.268,74.518 112.486,74.299 cw(c112.345,74.158) 112.486,74.016 cw(c112.345,74.158) 112.203,74.016 112.126,74.093 ccw(c111.985,73.952) 111.843,74.093 111.475,73.725 111.475,73.375 ccw(c111.675,73.375) 111.675,73.175 111.821,73.175 cw(c111.821,72.975) 112.021,72.975 cw(c111.821,72.975) 111.821,72.775 111.675,72.775 ccw(c111.675,72.575) 111.475,72.575 ccw(c111.675,72.575) 111.675,72.375 111.725,72.375 cw(c111.725,72.175) 111.925,72.175 cw(c111.725,72.175) 111.725,71.975 111.675,71.975 ccw(c111.675,71.775) 111.475,71.775 ccw(c111.675,71.775) 111.675,71.575 111.725,71.575 cw(c111.725,71.375) 111.925,71.375 cw(c111.725,71.375) 111.725,71.175 111.675,71.175 ccw(c111.675,70.975) 111.475,70.975 ccw(c111.675,70.975) 111.675,70.775 111.725,70.775 cw(c111.725,70.575) 111.925,70.575 cw(c111.725,70.575) 111.725,70.375 111.675,70.375 ccw(c111.675,70.175) 111.475,70.175 ccw(c111.675,70.175) 111.675,69.975 112.125,69.975 cw(c112.125,69.775) 112.325,69.775 cw(c112.125,69.775) 112.125,69.575 111.675,69.575 ccw(c111.675,69.375) 111.475,69.375 111.475,69.346 ccw(c111.646,69.346) 111.646,69.175 cw(c111.646,68.975) 111.846,68.975 cw(c111.646,68.975) 111.646,68.775 ccw(c111.646,68.604) 111.475,68.604 111.475,67.675 111.688,67.463 ccw(c111.829,67.604) 111.97,67.463 112.324,67.816 cw(c112.465,67.675) 112.607,67.816 cw(c112.465,67.675) 112.607,67.533 112.112,67.038 111.617,66.543 ccw(c111.758,66.402) 111.617,66.26 ccw(c111.758,66.402) 111.9,66.26 112.395,66.755 112.89,67.25 cw(c113.031,67.109) 113.172,67.25 cw(c113.031,67.109) 113.172,66.968 112.677,66.473 112.182,65.978 ccw(c112.324,65.836) 112.182,65.695 ccw(c112.324,65.836) 112.465,65.695 112.921,66.15 cw(c112.96,66.11) 113,66.15 114.05,65.1 114.575,65.1 ccw(c114.575,65.3) 114.775,65.3 114.775,65.4 cw(c114.975,65.4) 114.975,65.6 cw(c114.975,65.4) 115.175,65.4 115.175,64.8 ccw(c115.375,64.8) 115.375,64.6 ccw(c115.375,64.8) 115.575,64.8 115.575,65.4 cw(c115.775,65.4) 115.775,65.6 cw(c115.775,65.4) 115.975,65.4 115.975,64.8 ccw(c116.175,64.8) 116.175,64.6 ccw(c116.175,64.8) 116.375,64.8 116.375,65.4 cw(c116.575,65.4) 116.575,65.6 cw(c116.575,65.4) 116.775,65.4 116.775,65.3 ccw(c116.975,65.3) 116.975,65.1 117.675,65.1 119.475,66.9 119.475,70.575 120.225,71.325 121.043,71.325 U1.23@121.585,70.783 ; 113.617,75.431 113.399,75.649 cw(c113.483,75.733) 113.399,75.817 113.514,75.932 cw(c113.598,75.848) 113.682,75.932 113.9,75.714 ccw(c114.042,75.855) 114.183,75.714 ccw(c114.042,75.855) 114.183,75.996 113.965,76.215 cw(c114.049,76.299) 113.965,76.382 114.08,76.498 cw(c114.164,76.414) 114.248,76.498 114.466,76.279 ccw(c114.607,76.421) 114.749,76.279 ccw(c114.607,76.421) 114.749,76.562 114.53,76.78 cw(c114.614,76.864) 114.53,76.948 114.645,77.063 cw(c114.729,76.979) 114.813,77.063 115.032,76.845 ccw(c115.173,76.986) 115.314,76.845 ccw(c115.173,76.986) 115.314,77.128 115.238,77.205 cw(c115.379,77.346) 115.237,77.487 115.4,77.65 116.725,77.65 116.924,77.849 116.977,77.849 117.361,78.233 117.361,78.286 120.825,81.75 125.35,81.75 127.71,84.11 U2.28@127.71,85.903
FB_INT_SEL: J2.2 U2.128 | length 53.5
  Top Layer w0.2: v1(113.825,85.9) 114.2,85.525 115.175,85.525 115.66,86.01 U2.128@115.66,87.153 U2.128@114.753,87.153
  Bottom Layer w0.2: v1@113.8,85.9 114.285,86.385 114.285,101.816 114.869,102.4 114.939,102.471 ccw(c114.869,102.541) 114.939,102.612 cw(c115.081,102.754) 114.939,102.895 cw(c115.081,102.754) 115.222,102.895 115.293,102.824 115.364,102.754 ccw(c115.505,102.895) 115.646,102.754 ccw(c115.505,102.895) 115.646,103.036 115.576,103.107 115.505,103.178 cw(c115.646,103.319) 115.505,103.461 cw(c115.646,103.319) 115.788,103.461 115.859,103.39 115.929,103.319 ccw(c116.071,103.461) 116.212,103.319 ccw(c116.071,103.461) 116.212,103.602 116.141,103.673 116.071,103.744 cw(c116.212,103.885) 116.071,104.026 cw(c116.212,103.885) 116.354,104.026 116.424,103.956 116.495,103.885 ccw(c116.636,104.026) 116.778,103.885 ccw(c116.636,104.026) 116.778,104.168 116.707,104.239 116.636,104.309 cw(c116.778,104.451) 116.636,104.592 cw(c116.778,104.451) 116.919,104.592 116.99,104.521 117.061,104.451 ccw(c117.202,104.592) 117.344,104.451 ccw(c117.202,104.592) 117.344,104.733 117.334,104.743 cw(c117.396,104.804) 117.334,104.866 121.569,109.1 137.14,109.1 J2.2@139.9,106.34